# EAGLE board Wiring (EAGLE 6.0)
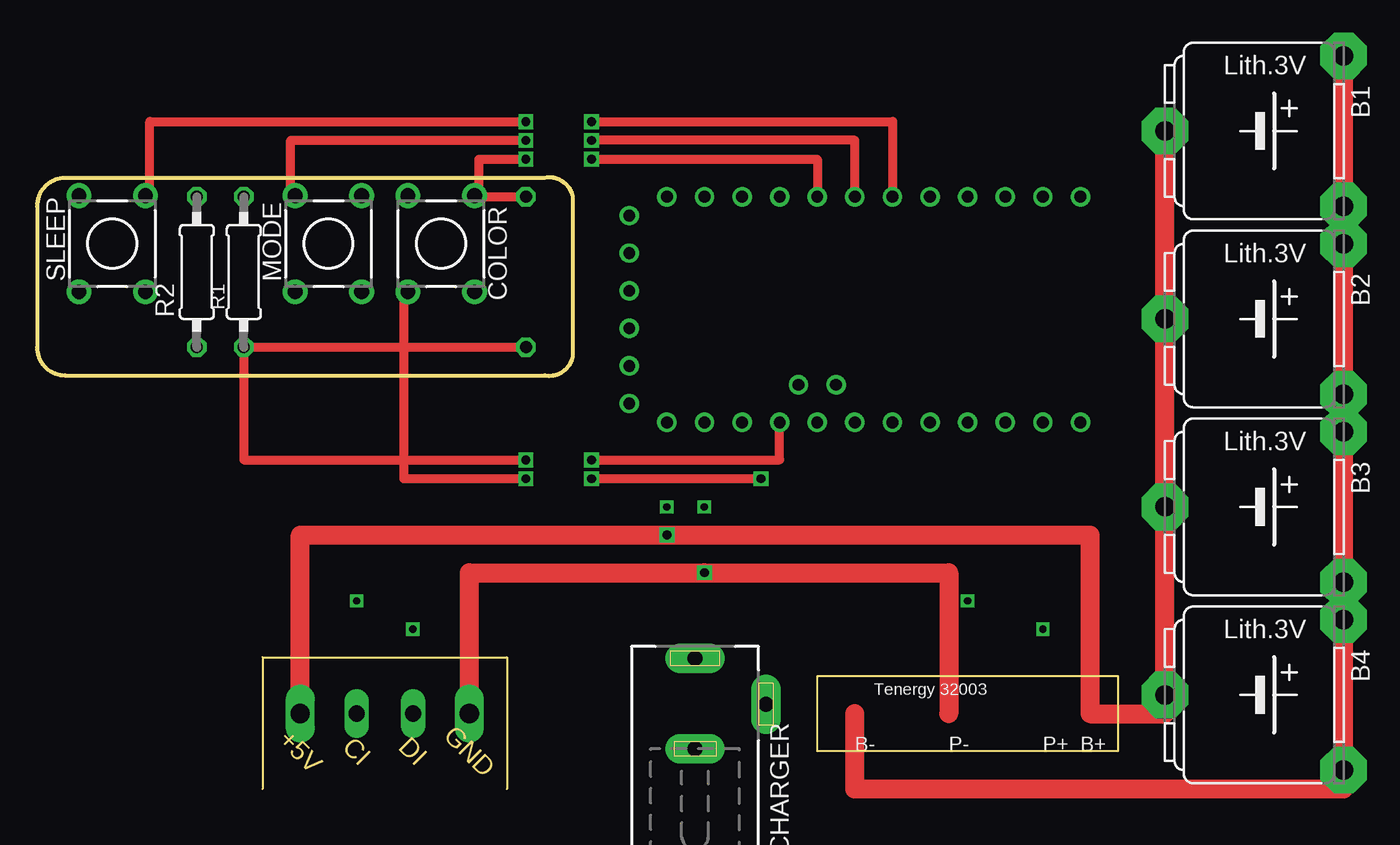
[diagram p0: board, top side]
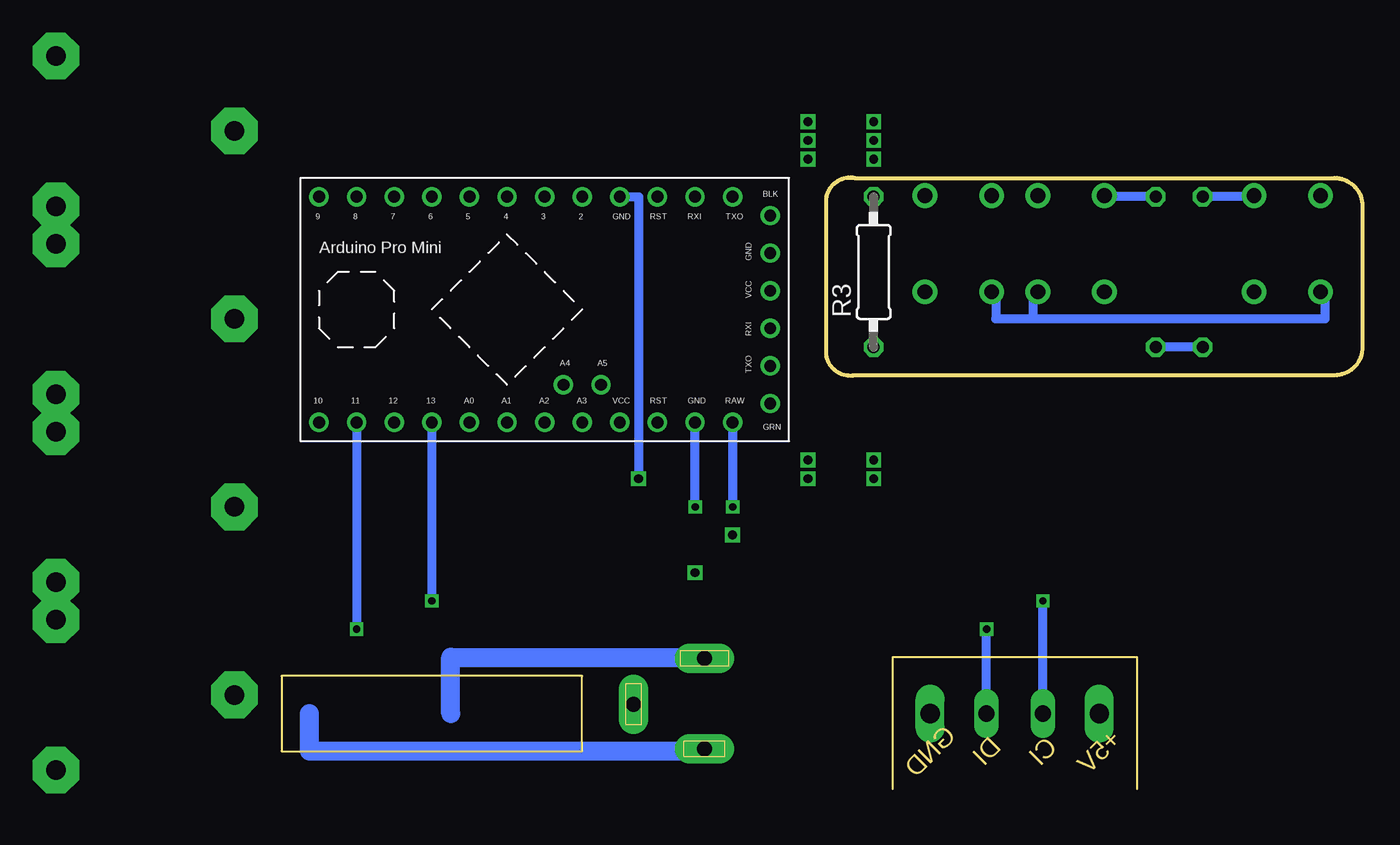
[diagram p1: board, bottom side, seen from below]

Size 73.03 x 41.31 mm. Coordinates in mm from the lower left corner, seen from the top.
Outline: 34.29,41.28 1.9,41.28 arc90 0,39.37 0,29.84 arc90 1.9,27.94 34.29,27.94 arc90 36.19,29.21 36.19,40.01 arc90 34.29,41.28
Copper layers (1*16): Top 0.035mm / dielectric 1.5mm / Bottom 0.035mm
Design rules: minimum track width 10mil, minimum drill 24mil, track to track 8mil, track to pad 8mil, pad to pad 8mil, via to via 8mil, smd to smd 8mil, copper to edge 40mil, drill to drill 8mil, minimum pad ring 10mil, minimum via ring 8mil, stop-mask expansion 4mil, vias tented up to drill 0mil, thermal gap 10mil

## Footprints (pad centres in the part's own frame; a part is rotated, then mirrored left to right if it is on the bottom)
CR03N = drill 1.321 pad 3.15 octagon: + -5.08,-5.08; +@1 -5.08,5.08; - 6.985,0
DCJ0303 = drill 1 pad 2 long: 1 0,3.1; 2 4.8,0; 3 0,-3
TL1105 = drill 1 pad 1.676: 1 -2.25,3.25; 2 2.25,3.25; 3 -2.25,-3.25; 4 2.25,-3.25
ARDUINO_PRO_MINI = drill 0.8: A0 -6.35,-7.62; A1 -3.81,-7.62; A2 -1.27,-7.62; A3 1.27,-7.62; A4 0,-5.08; A5 2.54,-5.08; BLK 13.97,6.35; D2 1.27,7.62; D3 -1.27,7.62; D4 -3.81,7.62; D5 -6.35,7.62; D6 -8.89,7.62; D7 -11.43,7.62; D8 -13.97,7.62; D9 -16.51,7.62; D10 -16.51,-7.62; D11 -13.97,-7.62; D12 -11.43,-7.62; D13 -8.89,-7.62; GND1 8.89,-7.62; GND2 3.81,7.62; GND3 13.97,3.81; GRN 13.97,-6.35; RAW 11.43,-7.62; RST1 6.35,-7.62; RST2 6.35,7.62; RXI 8.89,7.62; RXI2 13.97,-1.27; TXO 11.43,7.62; TXO2 13.97,-3.81; VCC1 3.81,-7.62; VCC2 13.97,1.27
LPD8806STRIP = drill 1.3 long: +5V 2.54,-3.81; GND 13.97,-3.81 | drill 1.1 long: CI 6.35,-3.81; DI 10.16,-3.81
0207/10 = drill 0.813 octagon: 1 -5.08,0; 2 5.08,0

## Placement (x,y rotation side)
B1  [CR03N]  83.19,44.45 180 top  (outside the outline)
B2  [CR03N]  83.19,31.75 180 top  (outside the outline)
B3  [CR03N]  83.19,19.05 180 top  (outside the outline)
B4  [CR03N]  83.19,6.35 180 top  (outside the outline)
CHARGER  4.2 volts DC  [DCJ0303]  44.45,5.72 0 top
COLOR  [TL1105]  27.31,36.83 180 top
E$1  [ARDUINO_PRO_MINI]  53.98,32.38 0 bottom
E$2  [LPD8806STRIP]  15.24,8.89 0 top
E$3  [TENERGY32003]  62.87,5.08 0 top
MODE  [TL1105]  19.68,36.83 0 top
R1  [0207/10]  13.97,34.93 90 top
R2  [0207/10]  10.79,34.93 90 top
R3  [0207/10]  33.02,34.93 90 bottom
SLEEP  [TL1105]  5.08,36.83 0 top

## Library data of the parts
B1-B4 = battery
CHARGER = con-jack
COLOR MODE SLEEP = switch
E$1 = Halley.rpt
E$2 = LPD8806
E$3 = Jubilee
R1-R3 = resistor

## Nets
S$4: R2.2
S$5: R1.2
S$6: R3.2
S$7: R1.1 R2.1 R3.1
S$8: E$1.D2
S$10: E$1.VCC1
S$12: E$1.D3
S$13: E$1.GND2
S$15: E$1.D4
S$16: B1.- E$2.+5V
S$17: E$2.GND
S$20: E$1.RAW
S$21: E$1.GND1
S$22: E$1.D11
S$23: E$2.DI
S$24: E$2.CI
S$25: E$1.D13
S$27: B1.+ B4.+@1

## Tracks (layer width: path | path; a pad name or v marks a point on that pad's centre or on a via)
S$1  (via drill 0.6)
  Top 0.61: 7.62,40.01 7.62,45.09 v33.02,45.09
S$2  (via drill 0.6)
  Top 0.61: 17.14,40.01 17.14,43.82 v33.02,43.82
S$3  (via drill 0.6)
  Top 0.61: 29.85,40.01 29.85,42.55 v33.02,42.55
S$4
  Bottom 0.61: 7.62,40.01 R2.2
S$5
  Bottom 0.61: R1.2 17.14,40.01
S$6
  Top 0.61: 29.85,40.01 R3.2
S$7  (via drill 0.6)
  Top 0.61: R3.1 R1.1 13.97,22.22 v33.02,22.22
  Bottom 0.61: R2.1 R1.1
S$8  (via drill 0.6)
  Top 0.61: v37.47,42.55 52.7,42.55 E$1.D2
S$9
  Bottom 0.61: 24.76,33.66 24.76,31.75 22.22,31.75 | 2.54,33.66 2.54,31.75 21.59,31.75 22.22,31.75 | 22.22,31.75 22.22,33.66
S$10  (via drill 0.6)
  Top 0.61: v37.47,22.22 50.17,22.22 E$1.VCC1
S$12  (via drill 0.6)
  Top 0.61: E$1.D3 55.25,43.82 v37.47,43.82
S$13  (via drill 0.6)
  Top 0.61: v48.89,20.95 v37.47,20.95
  Bottom 0.61: E$1.GND2 48.89,40.01 v48.89,20.95
S$14  (via drill 0.6)
  Top 0.61: 24.76,33.66 24.76,20.95 v33.02,20.95
S$15  (via drill 0.6)
  Top 0.61: v37.47,45.09 57.78,45.09 E$1.D4
S$16  (via drill 0.6)
  Top 1.27: E$2.+5V 17.78,17.14 v42.55,17.14 71.12,17.14 71.12,5.08 76.2,5.08 B1.-
S$17  (via drill 0.6)
  Top 1.27: E$2.GND 29.21,14.61 v45.08,14.61 61.59,14.61 61.59,5.08
S$19
  Bottom 1.27: 44.45,2.54 71.12,2.54 71.12,5.08
S$20  (via drill 0.5)
  Bottom 0.61: E$1.RAW v42.55,19.05
S$21  (via drill 0.5)
  Bottom 0.61: v45.08,19.05 E$1.GND1
S$22  (via drill 0.5)
  Bottom 0.61: E$1.D11 v67.95,10.8
S$23  (via drill 0.5)
  Bottom 0.61: E$2.DI v25.4,10.8
S$24  (via drill 0.5)
  Bottom 0.61: E$2.CI v21.59,12.7
S$25  (via drill 0.5)
  Bottom 0.61: E$1.D13 v62.87,12.7
S$26
  Bottom 1.27: 61.59,5.08 61.59,8.89 44.45,8.89
S$27
  Top 1.27: 55.25,5.08 55.25,0 88.27,0 B4.+@1 B1.+